# EAGLE board board_projektpraktikum (EAGLE 7.7.0)
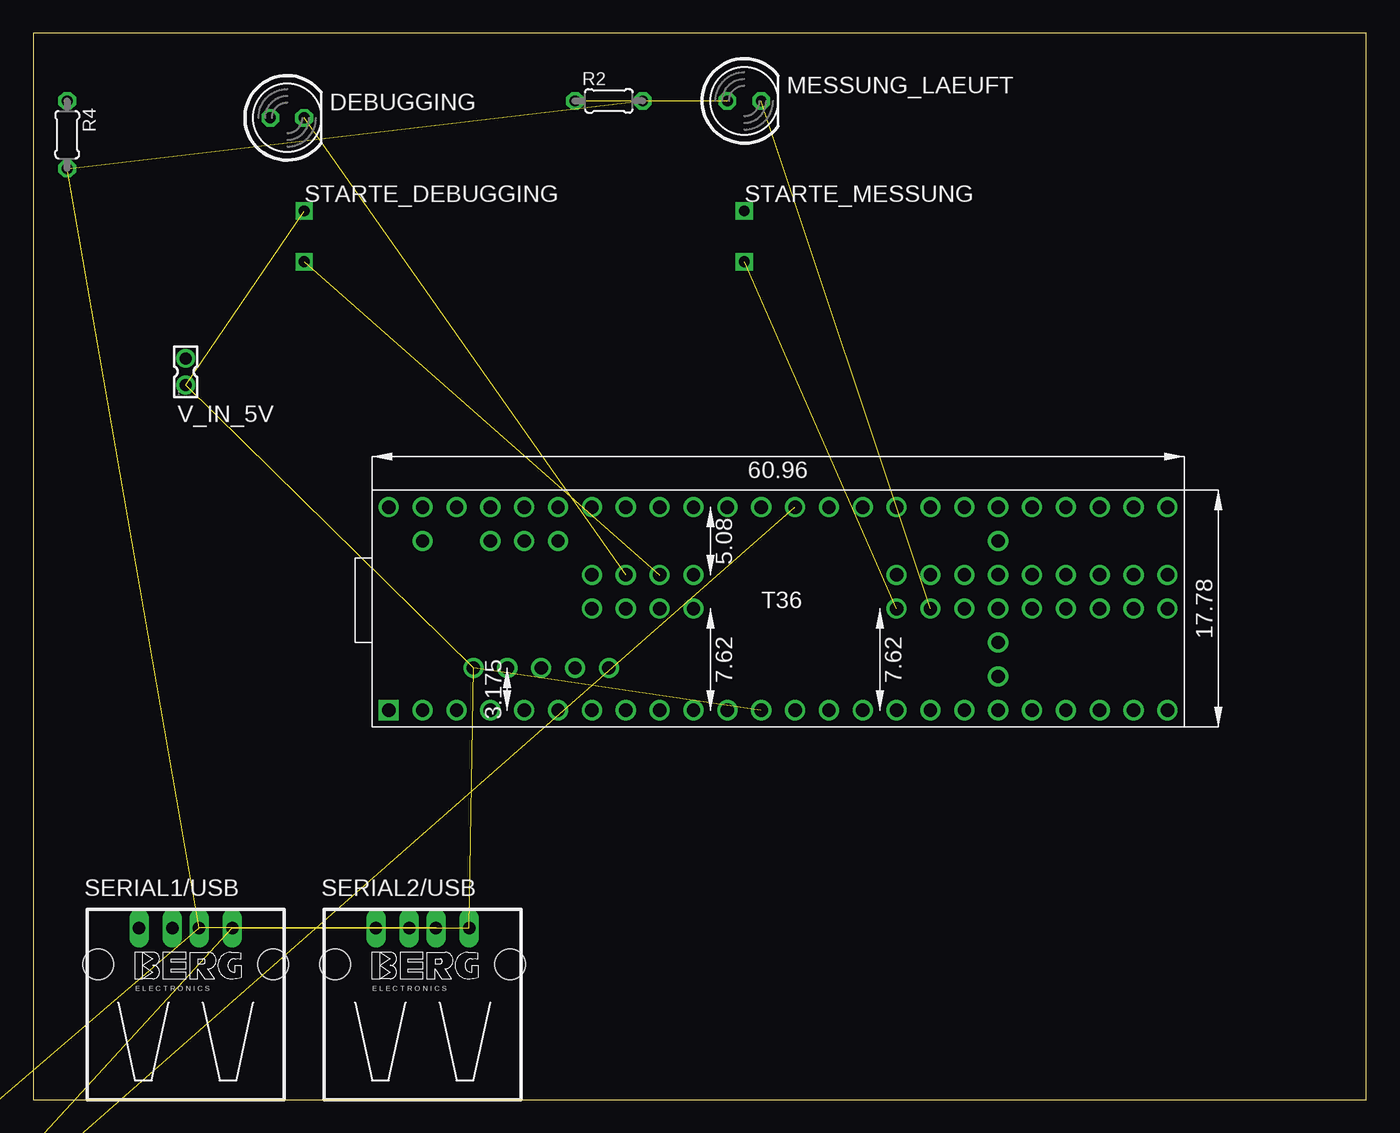
[diagram p0: board, top side]
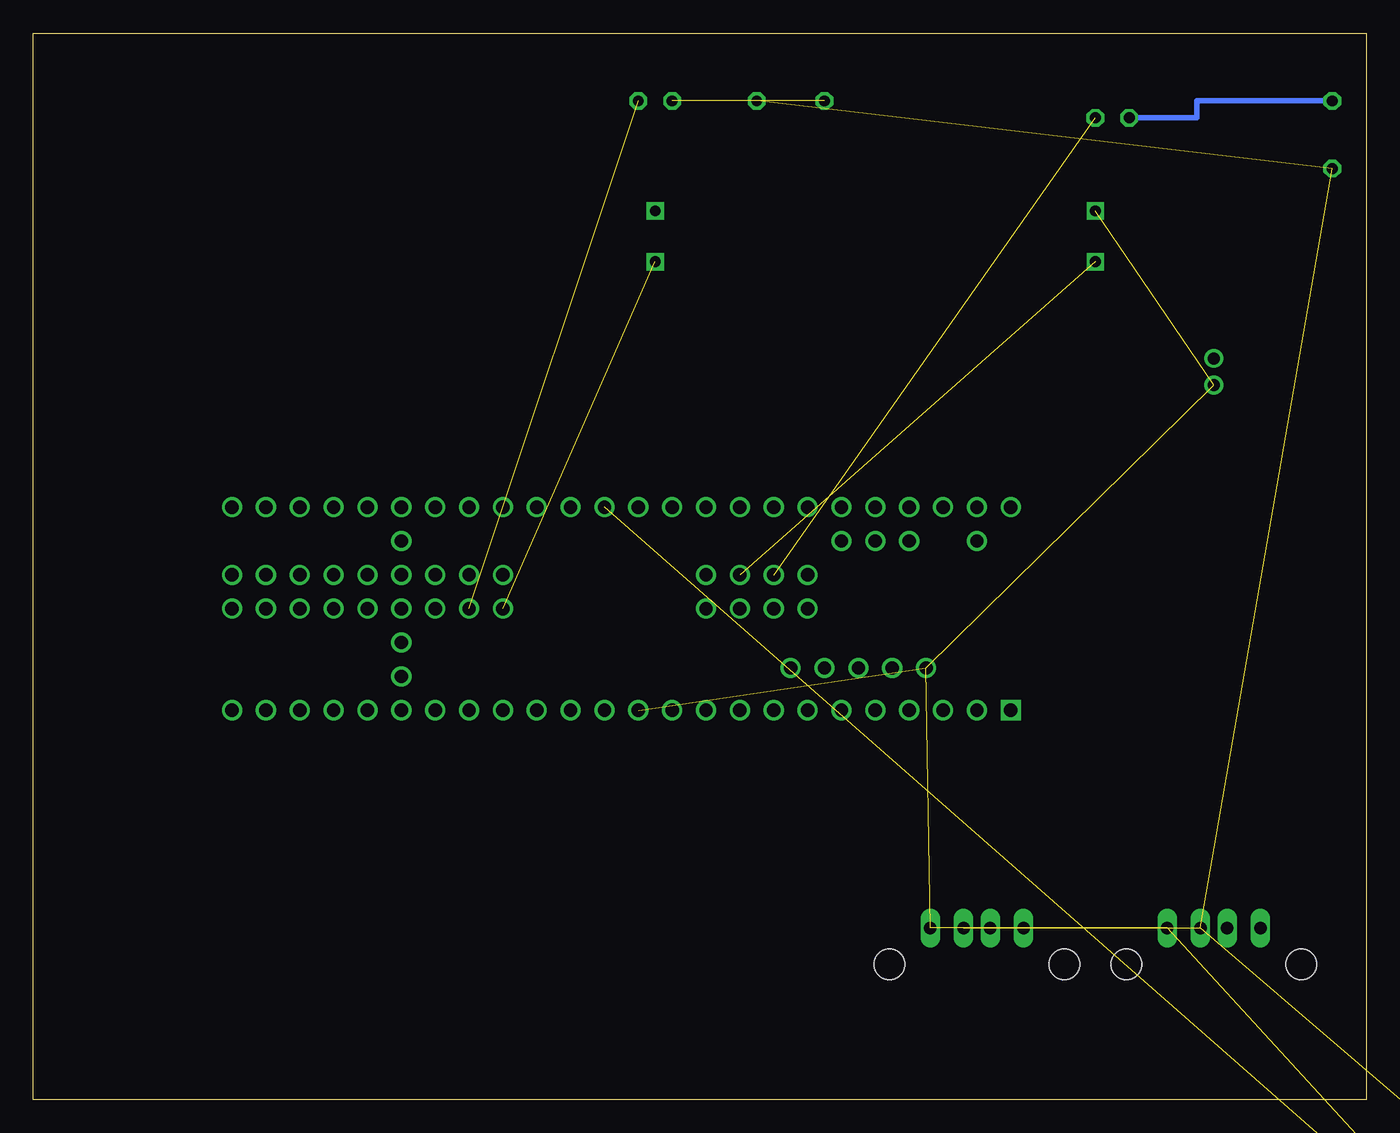
[diagram p1: board, bottom side, seen from below]

Size 100 x 80 mm. Coordinates in mm from the lower left corner, seen from the top.
Outline: 0,0 100,0 100,80 0,80 0,0
Copper layers (1*16): Top 0.035mm / dielectric 1.5mm / Bottom 0.035mm
Design rules "default": minimum track width 10mil, minimum drill 24mil, track to track 8mil, track to pad 8mil, pad to pad 8mil, via to via 8mil, smd to smd 8mil, copper to edge 40mil, drill to drill 8mil, minimum pad ring 10mil, minimum via ring 8mil, stop-mask expansion 4mil, vias tented up to drill 0mil, thermal gap 10mil

## Footprints (pad centres in the part's own frame; a part is rotated, then mirrored left to right if it is on the bottom)
LED5MM = drill 0.813 octagon: A -1.27,0; K 1.27,0
SPB4 = drill 0.813 long: 1 -3.048,0; 2 -1.016,0; 3 1.016,0; 4 3.048,0
1X07 = drill 1.016 pad 1.88: 1 0,0; 2 2.54,0; 3 5.08,0; 4 7.62,0; 5 10.16,0; 6 12.7,0; 7 15.24,0
1X16 = drill 1.016 pad 1.88: 1 0,0; 2 2.54,0; 3 5.08,0; 4 7.62,0; 5 10.16,0; 6 12.7,0; 7 15.24,0; 8 17.78,0; 9 20.32,0; 10 22.86,0; 11 25.4,0; 12 27.94,0; 13 30.48,0; 14 33.02,0; 15 35.56,0; 16 38.1,0
SOT23 = smd 0.9 x 1.2: 1 -0.95,-1.2; 2 0.95,-1.2; 3 0,1.2
0204/5 = drill 0.813 octagon: 1 -2.54,0; 2 2.54,0
PN87520 = drill 0.95 long: 1 -3.5,2.71; 2 -1,2.71; 3 1,2.71; 4 3.5,2.71 | hole 2.3: -6.57,0; 6.57,0
EINTASTER = drill 0.8 square: 13 0,1.905; 14 0,-1.905
T36 = drill 1: 0 -15.24,-5.08; 1 -12.7,-5.08; 2 -10.16,-5.08; 3 -7.62,-5.08; 3V3(1) 17.78,-5.08; 3V3(2) 27.94,0; 3V3(3) -12.7,10.16; 3V3(4) 40.64,5.08; 4 -5.08,-5.08; 5 -2.54,-5.08; 5V -11.43,-1.905; 6 0,-5.08; 7 2.54,-5.08; 8 5.08,-5.08; 9 7.62,-5.08; 10 10.16,-5.08; 11 12.7,-5.08; 12 15.24,-5.08; 13 15.24,10.16; 14 12.7,10.16; 15 10.16,10.16; 16 7.62,10.16; 17 5.08,10.16; 18 2.54,10.16; 19 0,10.16; 20 -2.54,10.16; 21 -5.08,10.16; 22 -7.62,10.16; 23 -10.16,10.16; 24 20.32,-5.08; 25 22.86,-5.08; 26 25.4,-5.08; 27 27.94,-5.08; 28 30.48,-5.08; 29 33.02,-5.08; 30 35.56,-5.08; 31 38.1,-5.08; 32 40.64,-5.08; 33 40.64,10.16; 34 38.1,10.16; 35 35.56,10.16; 36 33.02,10.16; 37 30.48,10.16; 38 27.94,10.16; 39 25.4,10.16; 40 20.32,2.54; 41 22.86,2.54; 42 25.4,2.54; 43 30.48,2.54; 44 33.02,2.54; 45 35.56,2.54; 46 38.1,2.54; 47 38.1,5.08; 48 35.56,5.08; 49 33.02,5.08; 50 30.48,5.08; 51 25.4,5.08; 52 22.86,5.08; 53 20.32,5.08; 54 5.08,5.08; 55 2.54,5.08; 56 0,5.08; 57 -2.54,5.08; A10 -7.62,7.62; A11 -5.08,7.62; AGND -15.24,10.16; AREF -10.16,7.62; D+ -6.35,-1.905; D- -8.89,-1.905; DAC0 22.86,10.16; DAC1 20.32,10.16; DC 2.54,2.54; DD 5.08,2.54; DE 0,2.54; G1 27.94,2.54; G2 17.78,10.16; G3 40.64,2.54; G4 -3.81,-1.905; G5 -1.27,-1.905; G6 -2.54,2.54; P 27.94,5.08; R 27.94,7.62; VBAT 27.94,-2.54; VIN -17.78,10.16; VUSB -15.24,7.62 | drill 1 square: G0 -17.78,-5.08
87758-0216 = drill 0.9 pad 1.27: 1 0,-1; 2 0,1

## Placement (x,y rotation side)
DEBUGGING  [LED5MM]  19.05,73.66 0 top
I²C  01  [SPB4]  -46.99,-7.62 0 top  (outside the outline)
J1  [1X07]  -46.99,-38.1 0 top  (outside the outline)
J2  [1X16]  -46.99,-57.15 0 top  (outside the outline)
MESSUNG_LAEUFT  [LED5MM]  53.34,74.93 0 top
Q1  BSS138  [SOT23]  -54.61,49.53 0 top  (outside the outline)
R2  200  [0204/5]  43.18,74.93 0 top
R4  200  [0204/5]  2.54,72.39 270 top
SERIAL1/USB  [PN87520]  11.43,10.16 0 top
SERIAL2/USB  [PN87520]  29.21,10.16 0 top
STARTE_DEBUGGING  [EINTASTER]  20.32,64.77 0 top
STARTE_MESSUNG  [EINTASTER]  53.34,64.77 0 top
U$1  TEENSY3_6--ALLPINS  [T36]  44.45,34.29 0 top
V_IN_5V  87758-0216  [87758-0216]  11.43,54.61 0 top

## Library data of the parts
DEBUGGING MESSUNG_LAEUFT = led
I²C = con-hirschmann; OC_FARNELL: unknown; OC_NEWARK: unknown
J1 J2 = SparkFun-Connectors
Q1 = m-pad-2.1
R2 R4 = resistor
SERIAL1/USB SERIAL2/USB = con-berg; OC_FARNELL: unknown; OC_NEWARK: unknown
STARTE_DEBUGGING STARTE_MESSUNG = e-schalter
U$1 = Teensy_3_6
V_IN_5V = con-molex; MPN: 87758-0216; OC_FARNELL: unknown; OC_NEWARK: 94M1513

## Nets
DISPLAY: J1.6 J1.7 SERIAL1/USB.4 SERIAL2/USB.4 STARTE_DEBUGGING.13 U$1.5V U$1.10 V_IN_5V.1
GND: J1.1 R2.2 R4.2 SERIAL1/USB.3 SERIAL2/USB.3
N$1: SERIAL1/USB.1
N$2: SERIAL1/USB.2
N$3: SERIAL2/USB.2
N$4: J1.5 U$1.14
N$5: SERIAL2/USB.1
N$6: I²C.2
N$7: I²C.1
N$8: STARTE_MESSUNG.14 U$1.40
N$10: J1.4
N$11: J2.16
N$13: J2.15
N$14: J2.14
N$15: MESSUNG_LAEUFT.A R2.1
N$16: MESSUNG_LAEUFT.K U$1.41
N$17: DEBUGGING.A R4.1
N$18: DEBUGGING.K U$1.56
N$19: STARTE_DEBUGGING.14 U$1.55
N$21: J2.13
N$22: J2.12
N$23: J2.11
N$24: J2.10
N$25: J2.9
N$26: J2.8
N$27: J2.7
N$28: J2.6
N$29: J2.5
N$30: J2.4
N$31: J2.3
N$32: J2.2
N$33: J2.1
N$34: STARTE_MESSUNG.13

## Tracks (layer width: path | path; a pad name or v marks a point on that pad's centre or on a via)
DISPLAY  (7 unrouted)
GND  (4 unrouted)
N$4  (1 unrouted)
N$8  (1 unrouted)
N$15  (1 unrouted)
N$16  (1 unrouted)
N$17
  Bottom 0.406: R4.1 12.7,74.93 12.7,73.66 DEBUGGING.A
N$18  (1 unrouted)
N$19  (1 unrouted)